# Altium PCB PCB2.PcbDoc
Units mm, origin at the board's own origin, x right, y up, seen from the top; angles counter-clockwise.
Board outline 34.67 x 63.37 mm, 2 copper layers (Top Layer, Bottom Layer); 9 components, 6 nets, 30 pads, 0 vias.
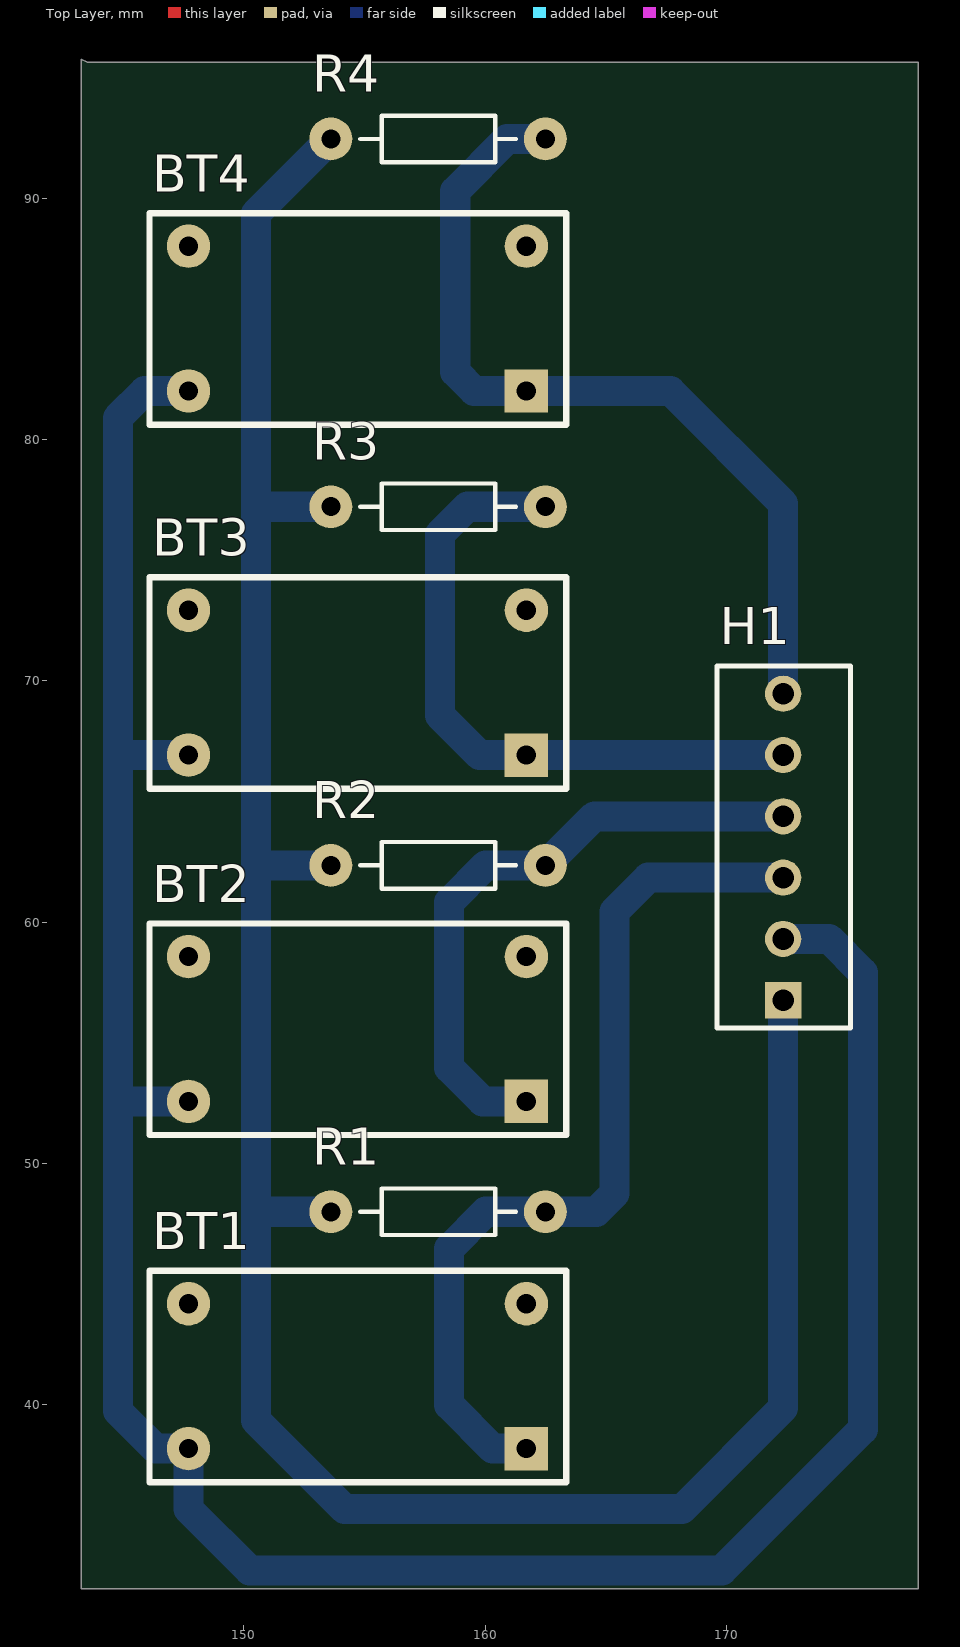
[diagram p0: Top Layer view]
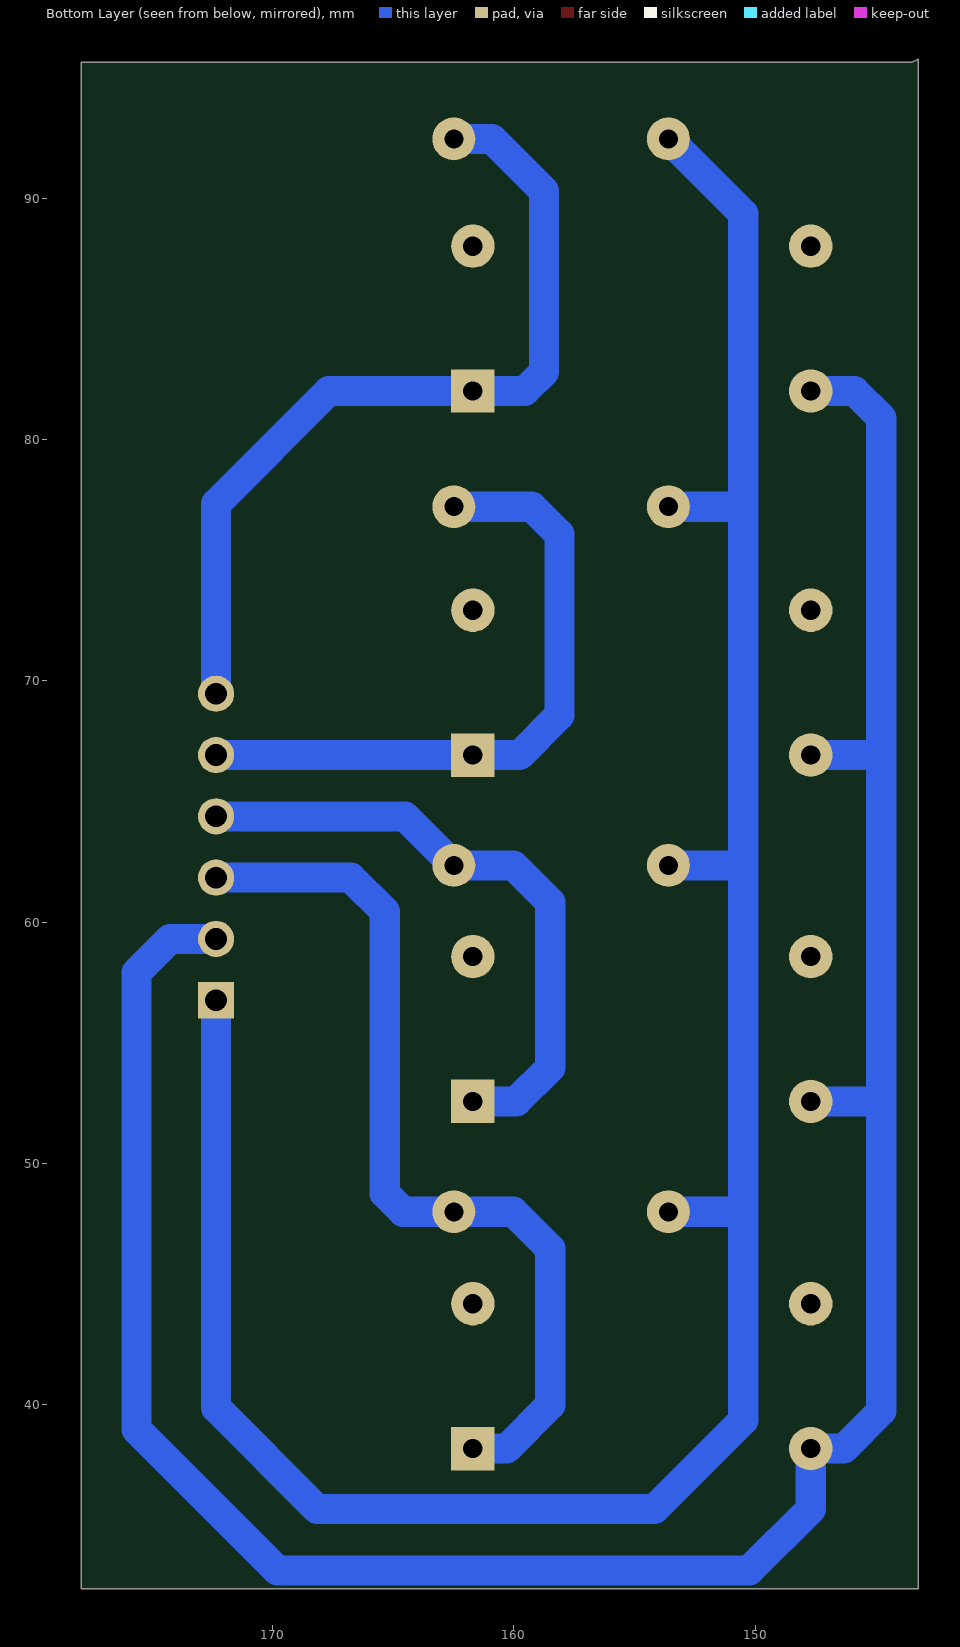
[diagram p1: Bottom Layer view, seen from below]
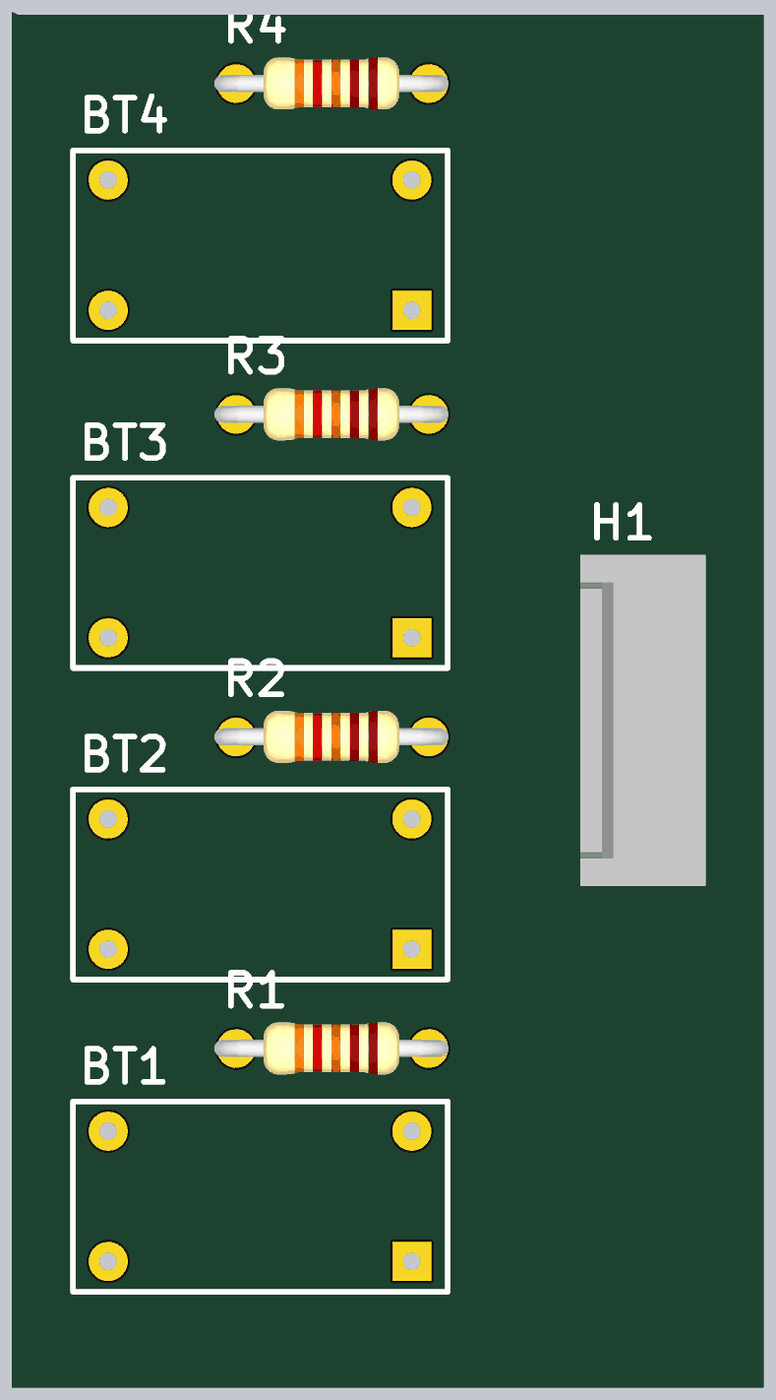
[diagram p2: 3D render of the assembled board from above, using the file's embedded part models]

## Layer stack, top to bottom
Top Solder: solder mask 0.0102, Solder Resist, Dk 3.5
Top Layer: signal copper 0.0356
Dielectric 1: dielectric 0.32, FR-4, Dk 4.8
Bottom Layer: signal copper 0.0356
Bottom Solder: solder mask 0.0102, Solder Resist, Dk 3.5

## Board outline
143.51,95.631 177.927,95.631 177.927,32.385 143.256,32.385 143.256,95.758

## Design rules (kind name [scope] priority, off if disabled: settings)
Clearance [All] p1: gap=0.5 ignorepadtopadclearanceinfootprint=FALSE
PolygonConnect [All] p1: connectstyle=Relief reliefconductorwidth=0.254 reliefentries=4 polygonreliefangle="90 Angle" airgapwidth=0.254
RoomDefinition Sheet1 [InComponentClass('Sheet1')] p1: confinementstyle=ConfineIn formatcopy=TRUE lockcomponents=FALSE outline 178.943,26.924 242.951,26.924 242.951,47.371 178.943,47.371
RoutingVias [All] p1: holewidth=0.711 width=1.27 viastyle="Through Hole" minholewidth=0.711 minwidth=1.27 maxholewidth=0.711 maxwidth=1.27
SolderMaskExpansion [All] p1: expansion=0.102
Width [All] p1: maxlimit=1.75 minlimit=0.85 preferedwidth=1.25
30 further rules are at their usual default settings.

## Components (designator, comment, footprint, x,y, rotation, side; value= is the part's Value field where it differs from the comment)
BT1 "BUTTON" BUTTON4 161.701,38.196 r180 top
BT2 "BUTTON" BUTTON4 161.701,52.578 r180 top
BT3 "BUTTON" BUTTON4 161.701,66.929 r180 top
BT4 "BUTTON" BUTTON4 161.701,82.011 r180 top
H1 "Header6" HDR6 172.339,56.769 r90 top
R1 "1k" R1/4W 153.598,48.006 r0 top value="R1/4W - 1K"
R2 "1k" R1/4W 153.598,62.357 r0 top value="R1/4W - 1K"
R3 "1k" R1/4W 153.598,77.216 r0 top value="R1/4W - 1K"
R4 "1k" R1/4W 153.598,92.456 r0 top value="R1/4W - 1K"

## Footprints (in the part's own frame and the unit in brackets; to place one, negate y for a bottom-side part, rotate by r counter-clockwise, add the part's x,y. Pads: shape width x height; smd on the part's side, far side on the other; paste and mask are expansions set on the pad)
BUTTON4 [mm]
  rect 1.8x1.8 hole 0.8: 1(0,0)
  round 1.8 hole 0.8: 2(0,-6) 3(14,-6) 4(14,0)
  silkscreen extent -1.65,-7.37 15.62,1.4, body extent -1.65,-7.37 15.62,1.4, height 1
HDR6 [mm] "Connector; Header; 6 Position"
  rect 1.5x1.5 hole 0.9: 1(0,0)
  round 1.5 hole 0.9: 2(2.54,0) 3(5.08,0) 4(7.62,0) 5(10.16,0) 6(12.7,0)
  silkscreen extent -1.14,-2.79 13.84,2.74, body extent -1.27,-2.92 13.97,2.88, height 11.72
R1/4W [mil] "R 1/4W, 2 Pin, 350mil"
  round 70 hole 31: 1(0,0) 2(350,0)
  silkscreen extent 48,-38 302,38, body extent -40,-47 386,47, height 111

## Part data
BT1 BT2 BT3 BT4: library part BUTTON4
H1: "Header IDC, 6 x 1 Pin Vertical 2.54mm Pitch (Non-Boxed, Male)"
R1 R2 R3 R4: library part R1/4W, "Resistor 1/4W"

## Nets (pads, with @x,y where several pads share a name; then routed paths per layer and width w, separated by ;. In a path a pad name is that pad's centre, name@x,y a point inside that pad or via, vN(x,y) a via of type N, cw(c..) or ccw(c..) an arc to the next point about the centre after c; other vN are vias at no path point)
BT1: BT1.1 H1.3 R1.2 | length 37.5
  Bottom Layer w1.25: BT1.1 160.305,38.196 158.496,40.005 158.496,46.482 160.02,48.006 R1.2 164.592,48.006 165.354,48.768 165.354,60.452 166.751,61.849 H1.3
BT2: BT2.1 H1.4 R2.2 | length 26
  Bottom Layer w1.25: BT2.1 159.893,52.578 158.496,53.975 158.496,60.833 160.02,62.357 R2.2 164.52,64.389 H1.4
BT3: BT3.1 H1.5 R3.2 | length 27.2
  Bottom Layer w1.25: R3.2 159.258,77.216 158.115,76.073 158.115,68.58 159.766,66.929 BT3.1 H1.5
BT4: BT4.1 H1.6 R4.2 | length 35.9
  Bottom Layer w1.25: R4.2 160.909,92.456 158.75,90.297 158.75,82.804 159.543,82.011 BT4.1 167.671,82.011 172.339,77.343 H1.6
GND: BT1.4 BT2.4 BT3.4 BT4.4 H1.2 | length 110.8
  Bottom Layer w1.25: BT2.4 144.907,52.578 144.78,52.705 ; BT3.4 144.907,66.929 144.78,67.056 ; BT4.4 145.892,82.011 144.78,80.899 144.78,67.056 ; H1.2 174.244,59.309 175.641,57.912 175.641,38.989 169.799,33.147 150.241,33.147 147.701,35.687 BT1.4 146.335,38.196 144.78,39.751 144.78,52.705 ; 144.78,52.705 144.78,67.056
VCC: H1.1 R1.1 R2.1 R3.1 R4.1 | length 105.8
  Bottom Layer w1.25: R1.1 150.495,48.006 ; R2.1 150.622,62.357 150.495,62.23 ; R3.1 150.622,77.216 150.495,77.343 ; R4.1 150.495,89.353 150.495,77.343 ; H1.1 172.339,39.878 168.148,35.687 154.178,35.687 150.495,39.37 150.495,48.006 ; 150.495,48.006 150.495,62.23 ; 150.495,62.23 150.495,77.343
pads on no net: BT1.2 BT1.3 BT2.2 BT2.3 BT3.2 BT3.3 BT4.2 BT4.3